# Altium PCB PCB1.PcbDoc (part 1 of 2)
Units mm, origin at the board's own origin, x right, y up, seen from the top; angles counter-clockwise.
Board outline 95 x 45 mm, 2 copper layers (Top Layer, Bottom Layer); 41 components, 96 nets, 303 pads, 0 vias.
Unrouted connection lines stored in the file: 18.
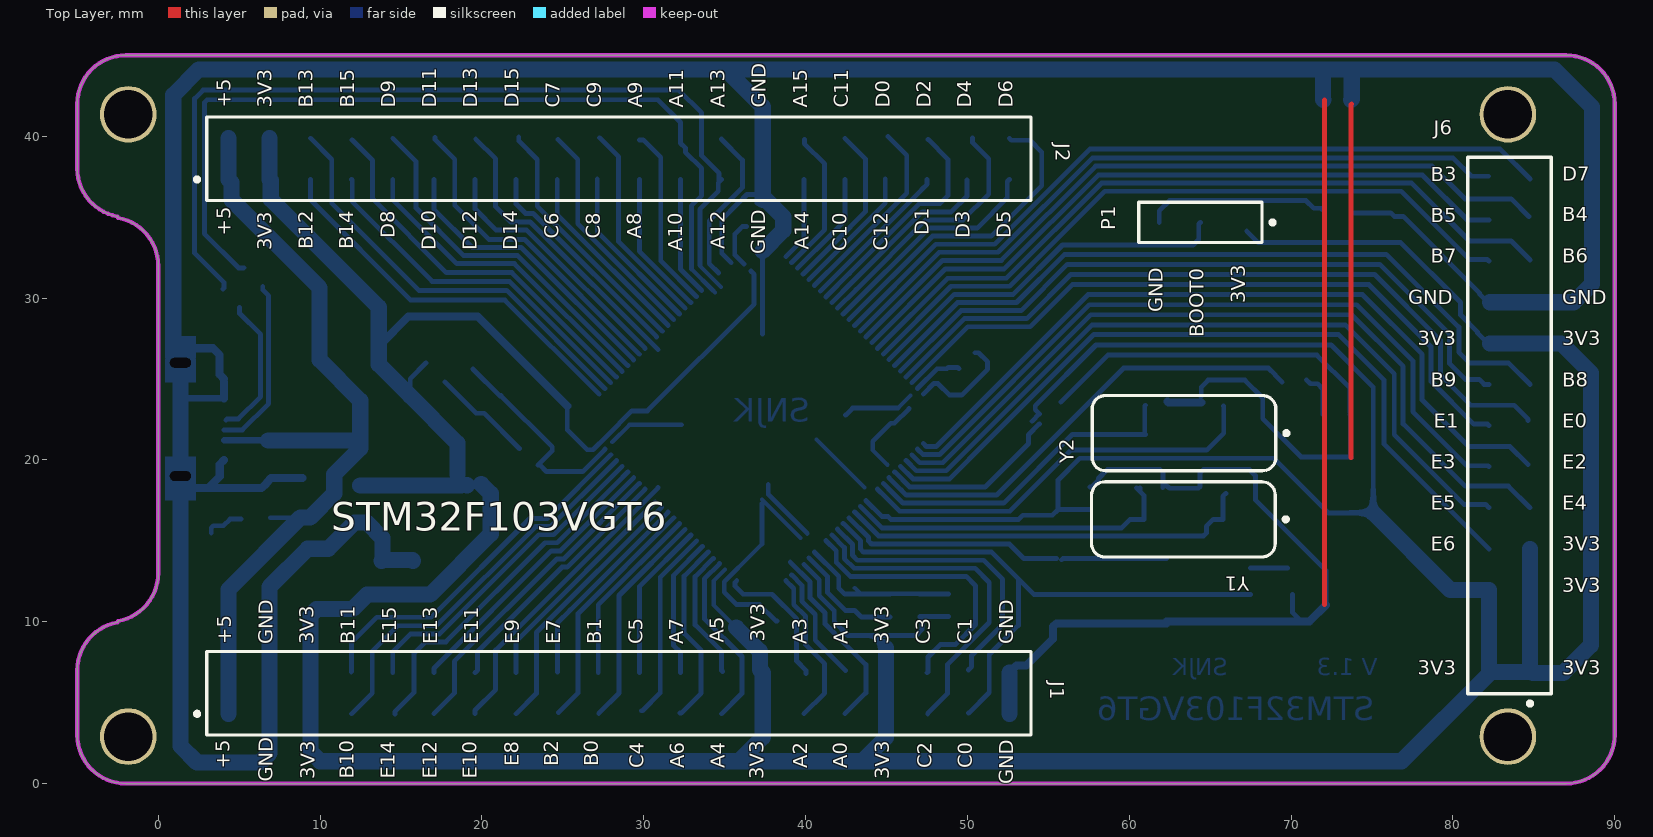
[diagram p0: Top Layer view]
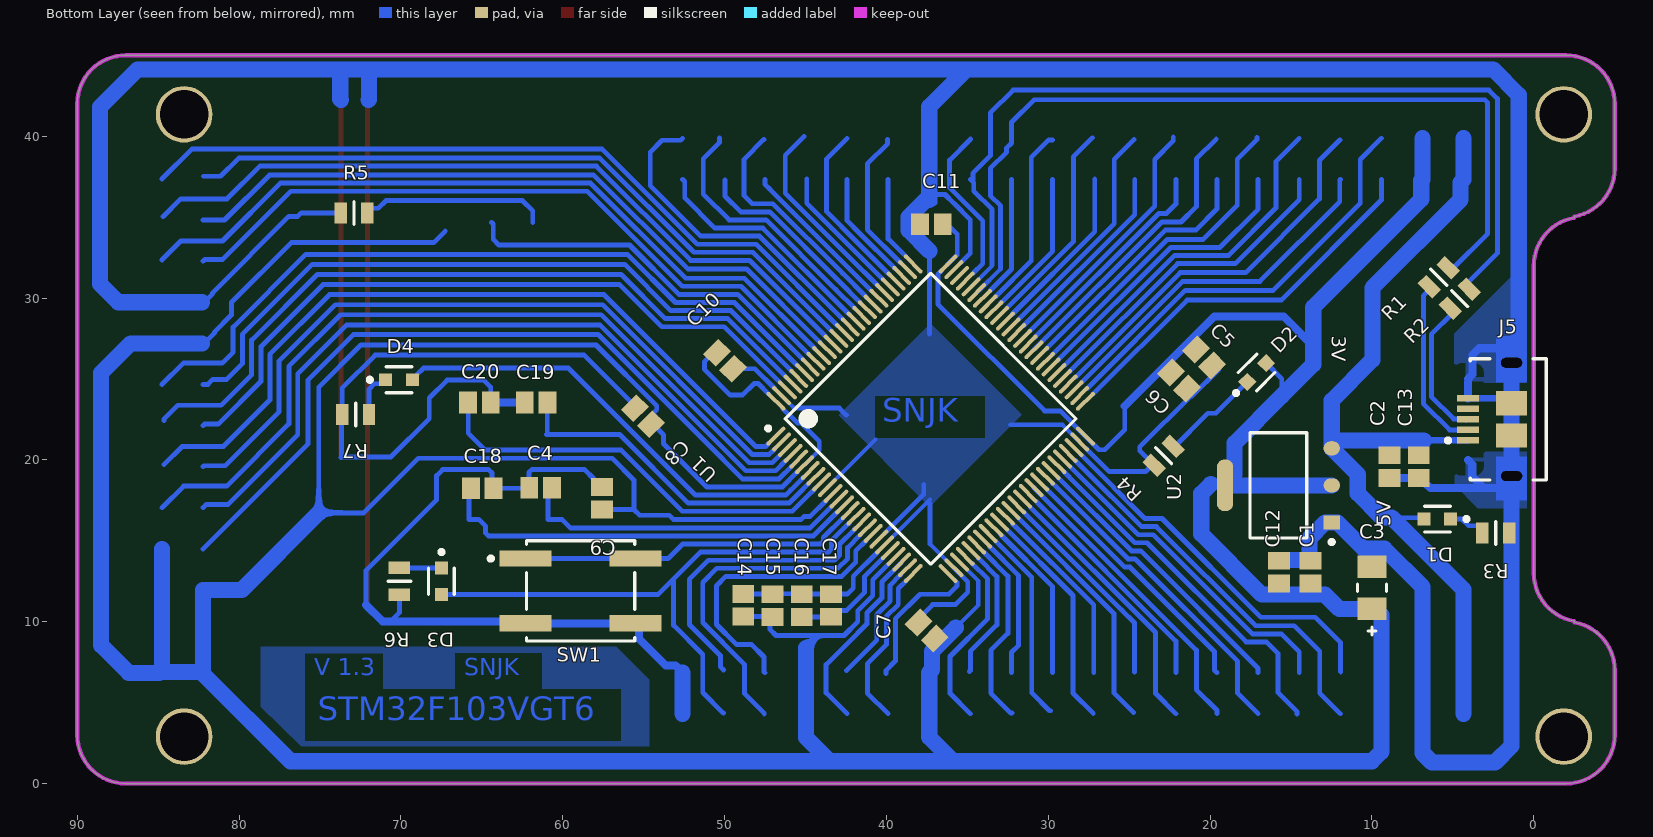
[diagram p1: Bottom Layer view, seen from below]

## Layer stack, top to bottom
Top Solder: solder mask 0.0102, Solder Resist, Dk 3.5
Top Layer: signal copper 0.0356
Dielectric 1: dielectric 0.32, FR-4, Dk 4.8
Bottom Layer: signal copper 0.0356
Bottom Solder: solder mask 0.0102, Solder Resist, Dk 3.5

## Board outline
-5,3 -5,7 cw(c-2,7) -2.521,9.954 -2.479,10.046 ccw(c-3,13) 0,13 0,32 ccw(c-3,32) -2.479,34.954 -2.521,35.046 cw(c-2,38) -5,38 -5,42 cw(c-2,42) -2,45 87,45 cw(c87,42) 90,42 90,3 cw(c87,3) 87,0 -2,0 cw(c-2,3)

## Design rules (kind name [scope] priority, off if disabled: settings)
Clearance [All] p1: gap=0.254 ignorepadtopadclearanceinfootprint=FALSE except(0.2: Arc-Arc Arc-Track Arc-SMDPad Track-Track Track-SMDPad SMDPad-SMDPad)
DiffPairsRouting [All] p1: maxlimit=0.5 minlimit=0.254 mostfreqgap=0.3 toplayer_minwidth=0.254 toplayer_maxwidth=0.5 toplayer_prefwidth=0.3 bottomlayer_minwidth=0.254 bottomlayer_maxwidth=0.5 bottomlayer_prefwidth=0.3 maxuncoupledlength=12.7
PolygonConnect PolygonConnect_5 [All vs IsNamedPolygon('GND_L02_P002')] p1: connectstyle=Direct reliefconductorwidth=0.254 reliefentries=4 polygonreliefangle="90 Angle" airgapwidth=0.254
PolygonConnect PolygonConnect_4 [All vs IsNamedPolygon('GND_L02_P002')] p2: thpad.connectstyle=Relief thpad.reliefconductorwidth=0.254 thpad.reliefentries=4 thpad.polygonreliefangle="90 Angle" thpad.airgapwidth=0.254 smdpad.connectstyle=Direct smdpad.reliefconductorwidth=0.254 smdpad.reliefentries=4 smdpad.polygonreliefangle="90 Angle" smdpad.airgapwidth=0.254 via.connectstyle=Relief via.reliefconductorwidth=0.254 via.reliefentries=4 via.polygonreliefangle="90 Angle" via.airgapwidth=0.254
PolygonConnect PolygonConnect_3 [All vs IsNamedPolygon('GND_L02_P002')] p3: thpad.connectstyle=Direct thpad.reliefconductorwidth=0.254 thpad.reliefentries=4 thpad.polygonreliefangle="90 Angle" thpad.airgapwidth=0.254 smdpad.connectstyle=Relief smdpad.reliefconductorwidth=0.254 smdpad.reliefentries=4 smdpad.polygonreliefangle="90 Angle" smdpad.airgapwidth=0.254 via.connectstyle=Relief via.reliefconductorwidth=0.254 via.reliefentries=4 via.polygonreliefangle="90 Angle" via.airgapwidth=0.254
PolygonConnect PolygonConnect_2 [All vs IsNamedPolygon('GND_L02_P002')] p4: thpad.connectstyle=Direct thpad.reliefconductorwidth=0.254 thpad.reliefentries=4 thpad.polygonreliefangle="90 Angle" thpad.airgapwidth=0.254 smdpad.connectstyle=Relief smdpad.reliefconductorwidth=0.254 smdpad.reliefentries=4 smdpad.polygonreliefangle="90 Angle" smdpad.airgapwidth=0.254 via.connectstyle=Relief via.reliefconductorwidth=0.254 via.reliefentries=4 via.polygonreliefangle="90 Angle" via.airgapwidth=0.254
PolygonConnect PolygonConnect_1 [All vs IsNamedPolygon('NONET_L02_P000')] p5: thpad.connectstyle=Direct thpad.reliefconductorwidth=0.254 thpad.reliefentries=4 thpad.polygonreliefangle="90 Angle" thpad.airgapwidth=0.254 smdpad.connectstyle=Relief smdpad.reliefconductorwidth=0.254 smdpad.reliefentries=4 smdpad.polygonreliefangle="90 Angle" smdpad.airgapwidth=0.254 via.connectstyle=Relief via.reliefconductorwidth=0.254 via.reliefentries=4 via.polygonreliefangle="90 Angle" via.airgapwidth=0.254
PolygonConnect [All] p6: connectstyle=Relief reliefconductorwidth=0.254 reliefentries=4 polygonreliefangle="90 Angle" airgapwidth=0.254
RoutingVias [All] p1: holewidth=0.711 width=1.27 viastyle="Through Hole" minholewidth=0.711 minwidth=1.27 maxholewidth=0.711 maxwidth=1.27
SolderMaskExpansion [All] p1: expansion=0.102 istentingtop=FALSE
SupplyNets "Schematic Supply Nets_2" [InNet('+5')] p1: voltage=0.000
SupplyNets "Schematic Supply Nets_1" [InNet('3V3')] p2: voltage=0.000
SupplyNets "Schematic Supply Nets" [InNet('GND')] p3: voltage=0.000
Width [All] p1: maxlimit=2 minlimit=0.254 preferedwidth=0.3
29 further rules are at their usual default settings.

## Classes and differential pairs
differential pair class DIFFPAIR_USB: USB_D
differential pair USB_D: +USB_D_P -USB_D_N

## Components (designator, comment, footprint, x,y, rotation, side; value= is the part's Value field where it differs from the comment)
C1 "C0805C105K3RACTU" CAPC2013X140X50LL20T25 13.803,13.069 r270 bottom
C2 "C0805C105K3RACTU" CAPC2013X140X50LL20T25 8.913,19.581 r90 bottom
C3 "TAJS226M004RNJ" FP-TAJS-MFG 10,12.1 r270 bottom
C4 "33pF" CAPC2013X140X50LL20T25 61.375,18.275 r180 bottom
C5 "10uF" CAPC2013X140X50LL20T25 20.375,26.325 r45 bottom
C6 "100nF" CAPC2013X140X50LL20T25 21.925,24.9 r45 bottom
C7 "100nF" CAPC2013X140X50LL20T25 37.515,9.451 r225 bottom
C8 "100nF" CAPC2013X140X50LL20T25 55.05,22.7 r225 bottom
C9 "100nF" CAPC2013X140X50LL20T25 57.575,17.625 r270 bottom
C10 "100nF" CAPC2013X140X50LL20T25 49.975,26.125 r45 bottom
C11 "100nF" CAPC2013X140X50LL20T25 37.226,34.562 r180 bottom
C12 "10nF" CAPC2013X140X50LL20T25 15.746,13.069 r270 bottom
C13 "10nF" CAPC2013X140X50LL20T25 7.106,19.581 r90 bottom
C14 "1uF" CAPC2013X140X50LL20T25 48.847,11.018 r270 bottom
C15 "10nF" CAPC2013X140X50LL20T25 47.04,10.997 r270 bottom
C16 "1uF" CAPC2013X140X50LL20T25 45.233,10.992 r270 bottom
C17 "10nF" CAPC2013X140X50LL20T25 43.426,11.002 r270 bottom
C18 "33puF" CAPC2013X140X50LL20T25 64.975,18.25 r0 bottom
C19 "33pF" CAPC2013X140X50LL20T25 61.65,23.55 r180 bottom
C20 "33puF" CAPC2013X140X50LL20T25 65.15,23.55 r0 bottom
D1 "SML-310VTT86" FP-SML-310VTT86-MFG 5.96,16.341 r0 bottom
D2 "SML-310VTT86" FP-SML-310VTT86-MFG 17.125,25.4 r135 bottom
D3 "SML-310VTT86" FP-SML-310VTT86-MFG 67.5,12.5 r270 bottom
D4 "SML-310VTT86" FP-SML-310VTT86-MFG 70.125,24.95 r180 bottom
J1 "7-534206-0" FP-7-534206-0-MFG#1 28.465,5.58 r0 top locked
J2 "7-534206-0" FP-7-534206-0-MFG#2 28.465,38.6 r0 top locked
J5 "105017-0001" USB-MICRO-B_V 2.725,22.5 r90 bottom locked
J6 "6-534206-3" FP-6-534206-3-MFG 83.495,22.12 r90 top locked
P1 "22-28-4033" MOLX-22-28-4033_V 64.4,34.675 r180 top
R1 "22ohm" FP-MCU0805-IPC_C 5.878,31.289 r315 bottom
R2 "22ohm" FP-MCU0805-IPC_C 4.578,29.967 r315 bottom
R3 "1kohm" FP-MCU0805-IPC_C 2.35,15.475 r180 bottom
R4 "1kohm" FP-MCU0805-IPC_C 22.875,20.25 r315 bottom
R5 "10k" FP-MCU0805-IPC_C 72.902,35.25 r180 bottom
R6 "1kohm" FP-MCU0805-IPC_C 70.1,12.5 r270 bottom
R7 "1kohm" FP-MCU0805-IPC_C 72.8,22.8 r0 bottom
SW1 "EVQ-Q2U02W" FP-EVQ-Q2U02W-MFG 58.9,11.9 r180 bottom
U1 "STM32F103VGT6" STM-LQFP100_L 37.267,22.542 r135 bottom locked
U2 "AMS1117-3.3" FP-AMS1117-IPC_C 15.78,18.425 r0 bottom locked
Y1 "FOXSLF/160-20" FOX-FOXSLF160-20#1 63.35,16.325 r180 top
Y2 "32.768 kHz" FOX-FOXSLF160-20#2 63.385,21.65 r180 top

## Footprints (in the part's own frame and the unit in brackets; to place one, negate y for a bottom-side part, rotate by r counter-clockwise, add the part's x,y. Pads: shape width x height; smd on the part's side, far side on the other; paste and mask are expansions set on the pad)
CAPC2013X140X50LL20T25 [mm] "Chip Capacitor, 2-Leads, Body 2.00x1.25mm, IPC High Density"
  rect 1.1x1.35 smd: 1(-0.7,0) 2(0.7,0)
  body extent -1.1,-0.73 1.1,0.73, height 1.4
FOX-FOXSLF160-20#1 [mm] "THD, 2-Leads, Body 11.35x4.65mm"
  rrect50% 2.825x1.2 on Mech7: 1(-2.44,0)
  rrect50% 2.75x1.2 on Mech7: 2(2.44,0)
  silkscreen extent -6.45,-2.33 5.68,2.32, body extent -5.67,-2.32 5.68,2.33, height 3.6
FOX-FOXSLF160-20#2 [mm] "THD, 2-Leads, Body 11.35x4.65mm"
  rrect50% 2.825x1.2 on Mech7: 1(-2.44,0)
  oval 2.825x1.2 on Mech7: 2(2.44,0)
  silkscreen extent -6.45,-2.33 5.68,2.32, body extent -5.67,-2.32 5.68,2.33, height 3.6
FP-6-534206-3-MFG [mm]
  round 0.025 on Mech7 paste-2539.97 mask+0: 1(-15.24,-1.27) 3(-12.7,-1.27) 5(-10.16,-1.27) 7(-7.62,-1.27) 9(-5.08,-1.27) 11(-2.54,-1.27) 13(0,-1.27) 15(2.54,-1.27) 17(5.08,-1.27) 19(7.62,-1.27) 21(10.16,-1.27) 23(12.7,-1.27) 25(15.24,-1.27)
  rrect50% 1.39x1.795 on Mech7 paste-2539.97 mask+0: 2(-15.24,1.27)
  rrect50% 1.39x1.72 on Mech7 paste-2539.97 mask+0: 4(-12.7,1.27) 6(-10.16,1.27) 18(5.08,1.27) 20(7.62,1.27)
  rrect50% 1.39x1.745 on Mech7 paste-2539.97 mask+0: 8(-7.62,1.27) 10(-5.08,1.27) 12(-2.54,1.27) 16(2.54,1.27)
  rrect50% 1.39x1.77 on Mech7 paste-2539.97 mask+0: 14(0,1.27) 24(12.7,1.27)
  rrect50% 1.39x1.82 on Mech7 paste-2539.97 mask+0: 22(10.16,1.27) 26(15.24,1.27)
  silkscreen extent -17.3,-2.58 16.58,2.58, body extent -16.68,-2.68 16.68,2.68, height 0.25
FP-7-534206-0-MFG#1 [mm]
  round 0.025 on Mech7 paste-2539.97 mask+0: 1(-24.13,-1.27) 3(-21.59,-1.27) 5(-19.05,-1.27) 7(-16.51,-1.27) 9(-13.97,-1.27) 11(-11.43,-1.27) 13(-8.89,-1.27) 15(-6.35,-1.27) 17(-3.81,-1.27) 19(-1.27,-1.27) 21(1.27,-1.27) 23(3.81,-1.27) 25(6.35,-1.27) 27(8.89,-1.27) 29(11.43,-1.27) 31(13.97,-1.27) 33(16.51,-1.27) 35(19.05,-1.27) 37(21.59,-1.27) 39(24.13,-1.27)
  rrect50% 1.39x1.77 on Mech7 paste-2539.97 mask+0: 2(-24.13,1.27) 4(-21.59,1.27) 10(-13.97,1.27) 12(-11.43,1.27) 16(-6.35,1.27) 22(1.27,1.27) 28(8.89,1.27)
  rrect50% 1.39x1.745 on Mech7 paste-2539.97 mask+0: 6(-19.05,1.27) 8(-16.51,1.27) 18(-3.81,1.27) 36(19.05,1.27)
  rrect50% 1.39x1.595 on Mech7 paste-2539.97 mask+0: 14(-8.89,1.27)
  rrect50% 1.39x1.72 on Mech7 paste-2539.97 mask+0: 20(-1.27,1.27) 24(3.81,1.27) 34(16.51,1.27)
  rrect50% 1.39x1.57 on Mech7 paste-2539.97 mask+0: 26(6.35,1.27)
  rrect50% 1.39x1.39 on Mech7 paste-2539.97 mask+0: 30(11.43,1.27) 32(13.97,1.27)
  rrect80% 1.39x1.62 on Mech7 paste-2539.97 mask+0: 38(21.59,1.27)
  rrect50% 1.39x1.85 on Mech7 paste-2539.97 mask+0: 40(24.13,1.27)
  silkscreen extent -26.19,-2.58 25.47,2.58, body extent -25.57,-2.68 25.57,2.68, height 0.25
FP-7-534206-0-MFG#2 [mm]
  rrect50% 1.39x1.75 on Mech7 paste-2539.97 mask+0: 1(-24.13,-1.27) 5(-19.05,-1.27) 9(-13.97,-1.27)
  round 0.025 on Mech7 paste-2539.97 mask+0: 2(-24.13,1.27) 4(-21.59,1.27) 6(-19.05,1.27) 8(-16.51,1.27) 10(-13.97,1.27) 12(-11.43,1.27) 14(-8.89,1.27) 16(-6.35,1.27) 18(-3.81,1.27) 20(-1.27,1.27) 22(1.27,1.27) 24(3.81,1.27) 26(6.35,1.27) 28(8.89,1.27) 30(11.43,1.27) 32(13.97,1.27) 34(16.51,1.27) 36(19.05,1.27) 38(21.59,1.27) 40(24.13,1.27)
  rrect50% 1.39x1.825 on Mech7 paste-2539.97 mask+0: 3(-21.59,-1.27)
  rrect50% 1.39x1.875 on Mech7 paste-2539.97 mask+0: 7(-16.51,-1.27) 17(-3.81,-1.27)
  rrect50% 1.39x1.8 on Mech7 paste-2539.97 mask+0: 11(-11.43,-1.27)
  rrect50% 1.39x1.85 on Mech7 paste-2539.97 mask+0: 13(-8.89,-1.27)
  rrect50% 1.39x1.765 on Mech7 paste-2539.97 mask+0: 15(-6.35,-1.27)
  rrect50% 1.39x1.74 on Mech7 paste-2539.97 mask+0: 19(-1.27,-1.27)
  rrect50% 1.39x1.775 on Mech7 paste-2539.97 mask+0: 21(1.27,-1.27)
  rrect50% 1.39x1.39 on Mech7 paste-2539.97 mask+0: 23(3.81,-1.27) 25(6.35,-1.27)
  rrect50% 1.39x1.725 on Mech7 paste-2539.97 mask+0: 27(8.89,-1.27)
  rrect50% 1.39x1.665 on Mech7 paste-2539.97 mask+0: 29(11.43,-1.27)
  rrect50% 1.39x1.865 on Mech7 paste-2539.97 mask+0: 31(13.97,-1.27)
  rrect50% 1.39x1.59 on Mech7 paste-2539.97 mask+0: 33(16.51,-1.27)
  rrect80% 1.39x1.775 on Mech7 paste-2539.97 mask+0: 35(19.05,-1.27)
  rrect80% 1.39x1.8 on Mech7 paste-2539.97 mask+0: 37(21.59,-1.27)
  rrect80% 1.39x1.725 on Mech7 paste-2539.97 mask+0: 39(24.13,-1.27)
  silkscreen extent -26.19,-2.58 25.47,2.58, body extent -25.57,-2.68 25.57,2.68, height 0.25
FP-AMS1117-IPC_C [mm]
  rect 1.004x0.872 smd paste+0 mask+0: 1(-3.295,2.29)
  rrect100% 1.004x0.872 smd paste+0 mask+0: 2(-3.295,0) 3(-3.295,-2.29)
  rrect87% 1.004x3.182 smd paste+0 mask+0: 4(3.295,0)
  silkscreen extent -3.42,-3.25 1.75,3.62, body extent -3.53,-3.25 3.53,3.25, height 1.8
FP-EVQ-Q2U02W-MFG [mm]
  rect 3.2x1 smd paste+0 mask+0: A(-3.4,2) A'(3.4,2) B(-3.4,-2) B'(3.4,-2)
  silkscreen extent -5.68,-3.1 3.35,3.1, body extent -3.3,-3 3.3,3, height 2.7
FP-MCU0805-IPC_C [mm]
  rect 0.759x1.308 smd paste+0 mask+0: 1(-0.827,0) 2(0.827,0)
  silkscreen extent 0,-0.7 0,0.7, body extent -1,-0.63 1,0.63, height 0.55
FP-SML-310VTT86-MFG [mm]
  rect 0.8x0.8 smd paste+0 mask+0: 1(-0.825,0) 2(0.825,0)
  silkscreen extent -1.92,-0.8 0.8,0.8, body extent -0.8,-0.4 0.8,0.4, height 0.9
FP-TAJS-MFG [mm]
  rect 1.4x1.8 smd paste+0 mask+0: 1(-1.3,0) 2(1.3,0)
  silkscreen extent -0.23,-0.9 2.92,0.9, body extent -1.6,-0.8 1.6,0.8, height 1.2
MOLX-22-28-4033_V [mil] "THD, 3-Leads, Body 7.62x2.49mm, Pitch 2.54mm"
  round 1 on Mech7: 1(-100,0) 3(100,0)
  rrect50% 75.79x61.02 on Mech7: 2(0,0)
  silkscreen extent -181,-49 150,49, body extent -150,-49 150,49, height 330
STM-LQFP100_L [mm] "Thin QFP, 100-Leads, Body 14x14mm, Pitch 0.5mm, IPC High Density"
  oval 1.55x0.25 smd: 1(-7.525,6) 2(-7.525,5.5) 3(-7.525,5) 4(-7.525,4.5) 5(-7.525,4) 6(-7.525,3.5) 7(-7.525,3) 8(-7.525,2.5) 9(-7.525,2) 10(-7.525,1.5) 11(-7.525,1) 12(-7.525,0.5) 13(-7.525,0) 14(-7.525,-0.5) 15(-7.525,-1) 16(-7.525,-1.5) 17(-7.525,-2) 18(-7.525,-2.5) 19(-7.525,-3) 20(-7.525,-3.5) 21(-7.525,-4) 22(-7.525,-4.5) 23(-7.525,-5) 24(-7.525,-5.5) 25(-7.525,-6) 51(7.525,-6) 52(7.525,-5.5) 53(7.525,-5) 54(7.525,-4.5) 55(7.525,-4) 56(7.525,-3.5) 57(7.525,-3) 58(7.525,-2.5) 59(7.525,-2) 60(7.525,-1.5) 61(7.525,-1) 62(7.525,-0.5) 63(7.525,0) 64(7.525,0.5) 65(7.525,1) 66(7.525,1.5) 67(7.525,2) 68(7.525,2.5) 69(7.525,3) 70(7.525,3.5) 71(7.525,4) 72(7.525,4.5) 73(7.525,5) 74(7.525,5.5) 75(7.525,6)
  oval 0.25x1.55 smd: 26(-6,-7.525) 27(-5.5,-7.525) 28(-5,-7.525) 29(-4.5,-7.525) 30(-4,-7.525) 31(-3.5,-7.525) 32(-3,-7.525) 33(-2.5,-7.525) 34(-2,-7.525) 35(-1.5,-7.525) 36(-1,-7.525) 37(-0.5,-7.525) 38(0,-7.525) 39(0.5,-7.525) 40(1,-7.525) 41(1.5,-7.525) 42(2,-7.525) 43(2.5,-7.525) 44(3,-7.525) 45(3.5,-7.525) 46(4,-7.525) 47(4.5,-7.525) 48(5,-7.525) 49(5.5,-7.525) 50(6,-7.525) 76(6,7.525) 77(5.5,7.525) 78(5,7.525) 79(4.5,7.525) 80(4,7.525) 81(3.5,7.525) 82(3,7.525) 83(2.5,7.525) 84(2,7.525) 85(1.5,7.525) 86(1,7.525) 87(0.5,7.525) 88(0,7.525) 89(-0.5,7.525) 90(-1,7.525) 91(-1.5,7.525) 92(-2,7.525) 93(-2.5,7.525) 94(-3,7.525) 95(-3.5,7.525) 96(-4,7.525) 97(-4.5,7.525) 98(-5,7.525) 99(-5.5,7.525) 100(-6,7.525)
  silkscreen extent -7.65,-6.35 6.35,6.8, body extent -7,-7 7,7, height 1.6
USB-MICRO-B_V [mm] "USB, MICRO B, Body 7.491x4.695 mm, Pitch 0.65 mm"
  rect 0.4x1.35 smd: 1(-1.3,1.35) 2(-0.65,1.35) 3(0,1.35) 4(0.65,1.35) 5(1.3,1.35)
  rrect50% 1.45x1.45 on Bottom Paste: 6(-2.5,1.35) 7(2.5,1.35)
  rrect50% 0x0 hole 0.6 slot 1.3 at 90 deg: 8(-3.5,-1.35) 11(3.5,-1.35)
  rect 1.5x1.9 smd: 9(-1,-1.35) 10(1,-1.35)
  Top Layer region: -3.6,-1.8 -3.6,-0.9 -4.1,-0.9 -4.1,-1.8
  Top Layer region: 3.6,-0.9 3.6,-1.8 4.1,-1.8 4.1,-0.9
  Top Layer region: 2.3,-0.4 2.3,-2.3 3.6,-2.3 3.6,-0.4
  Top Layer region: -2.3,-2.3 -2.3,-0.4 -3.6,-0.4 -3.6,-2.3
  Top Layer lines w0.5: 3.8,-1.65 ccw(c3.6,-1.8) 3.75,-1.6 ccw(c3.6,-1.8) 3.6,-1.55 ccw(c3.6,-1.8) 3.8,-1.65 ; -3.779,-1.625 cw(c-3.6,-1.8) -3.75,-1.6 cw(c-3.6,-1.8) -3.6,-1.55 cw(c-3.6,-1.8) -3.779,-1.625 ; 3.575,-1.149 ccw(c3.6,-0.9) 3.6,-0.65 ccw(c3.6,-0.9) 3.575,-0.651 ccw(c3.6,-0.9) 3.575,-1.149 ; -3.5,-1.129 ccw(c-3.6,-0.9) -3.5,-0.671 ccw(c-3.6,-0.9) -3.6,-0.65 ccw(c-3.6,-0.9) -3.8,-1.05 ccw(c-3.6,-0.9) -3.75,-1.1 ccw(c-3.6,-0.9) -3.5,-1.129
  silkscreen extent -3.75,-3.5 3.75,2.7, body extent -4.1,-3.9 4.1,1.5, height 2.67

## Part data
C1 C2: library part CMP-2007-03234-1, "10uf", Manufacturer=Kemet, Part Number=C0805C105K3RACTU
C3: library part CMP-04424-000180-1, "22uF 4V  ±20% 3.5Ω 1206  SMD Tantalum Capacitor", Capacitance=22uF, Case Code (Imperial)=1206, Case Code (Metric)=3216, Dielectric Material=Tantalum, ESR (Equivalent Series Resistance)=3.5R, Leakage Current=900nA, Max Operating Temperature=125°C, Min Operating Temperature=-55°C, Package Quantity=2500, Tolerance=20%, Voltage Rating=4V, Case/Package=1206, Construction=Flat, Depth=1.6mm, Dissipation Factor=8%, Features="General Purpose", Height=1.2mm, Height - Seated (Max)=0.047inch, Lead Free="Lead Free", Length=3.2mm, Mount="Surface Mount", Number of Pins=2, Packaging="Tape and Reel", Polarity=Polar, Radiation Hardening=No, RoHS Compliant=Yes, Series=TAJ, Termination=SMD/SMT, Voltage Rating (DC)=4V, Weight=0.000571oz, Width=0.063inch
C4 C18 C19 C20: library part CMP-2007-03234-1, "33pF 0805", Manufacturer=Kemet, Part Number=C0805C105K3RACTU
C5: library part CMP-2007-03234-1, "10uF 0805", Manufacturer=Kemet, Part Number=C0805C105K3RACTU
C6 C7 C8 C9 C10 C11: library part CMP-2007-03234-1, "100nF 0805", Manufacturer=Kemet, Part Number=C0805C105K3RACTU
C12 C13 C15 C17: library part CMP-2007-03234-1, "10nF 0805", Manufacturer=Kemet, Part Number=C0805C105K3RACTU
C14 C16: library part CMP-2007-03234-1, "1uF 0805", Manufacturer=Kemet, Part Number=C0805C105K3RACTU
D1 D2 D3 D4: library part CMP-2000-07115-2, "LED RED CLEAR 0603 SMD", Colour=Red, Forward Current=20mA, Forward Voltage=2V, Manufacturer=Rohm, Package=0, Power Dissipation=55mW, Reverse Voltage=4V, Temperature="-30°C to +85°C", Temperature Range High=+85°C, Temperature Range Low=-30°C, Automotive=No, Category=Diode, ComponentLink2Description=Datasheet, ComponentLink2URL=https://www.mouser.com/datasheet/2/348/sml-31-312817.pdf, Device Class L1=Optoelectronics, Device Class L2=LEDs, Device Class L3=unset, Digikey Description="LED RED CLEAR 0603 SMD", Height=0.9mm, Lead Free=Yes, Led Orientation="Top View", Luminous Intensity=4mcd, Manufacturer Part Number=SML-310VTT86, Mouser Description="Standard LEDs - SMD RED 650NM SMD TRANSPARENT LENS", Obsolete Part=true, Octopart=https://octopart.com/sml-310vtt86-rohm-550741, RoHS=TRUE, Wavelength=630nm
J1 J2: library part CMP-03369-000068-1, "CONN RCPT 40POS 0.1 GOLD PCB", Current Rating=2A, Manufacturer="TE Connectivity", Temperature="-65°C to +105°C", Temperature Range High=+105°C, Temperature Range Low=-65°C, Voltage Rating=333V, Automotive=No, Category=Conn, ComponentLink2Description=Datasheet, ComponentLink2URL=https://octopart.com/datasheet/7-534206-0-te+connectivity-39516831, Conn Gender=Female, Conn Orientation=Vertical, Contact Material=Gold,Nickel, Device Class L1=Connectors, Device Class L2="Headers and Wire Housings", Device Class L3=unset, Digikey Description="CONN RCPT 40POS 0.1 GOLD PCB", Footprint Url=https://www.mouser.in/datasheet/2/418/NG_CD_534206_R7-1252933.pdf, Height=8.9mm, Is Female=yes, Lead Free=Yes, Manufacturer Part Number=7-534206-0, Mouser Description="Headers & Wire Housings REC 2X20P VRT T/H", Number Of Contacts=40, Number Of Rows=2, Octopart=https://octopart.com/7-534206-0-te+connectivity-39516831, Package=7-534206-0, Pitch=2.54mm, RoHS=TRUE, Standoff Height=0.38mm
J5: library part CMP-2000-05827-1, "Micro-USB B Receptacle, Right Angle, Bottom Mount, Surface Mount, with Solder Tabs, -30 to 85 degC, 5-Pin USB, RoHS, Tape and Reel", Manufacturer=Molex, Package Description="5-Leads USB, Micro B, Body 7.5 x 5 mm, Pitch 0.65 mm", Package Reference=MICRO-B, Package Version="Rev. F, 12/2012", Standard Package=1, Voltage - Max=30V, 3D Model=105017-0001.stp, Catalog Drawings=1050170001, Category=Connectors,Interconnects, Circuits=5, Connector Type=USB-microB, Datasheet URL=http://www.molex.com/elqNow/elqRedir.htm?ref=http://www.molex.com/webdocs/datasheets/pdf/en-us/1050170001_IO_CONNECTORS.pdf, Datasheet Version=03/2016, Family=USB,DVI,HDMIConnectors, Featured Product=Micro-USBConnectorsUSBConnectors, Features=Shielded,SolderRetention, Gender=Receptacle, Ingress Protection=-, Manufacturer URL=http://www.molex.com/, Mating Products=WM17145-ND-CABLEMICROUSBBTOSTDA1.0MWM17147-ND-CABLEMICROUSBBTOSTDA2.0MWM17146-ND-CABLEMICROUSBBTOSTDA1.5M, Mounting Technology=SurfaceMount, Mounting Type=BoardCutout,SurfaceMount,RightAngle, Number Of Contacts=5, Online Catalog=Molex-MicroUSB, Other Names=WM1399DKR, Package URL=http://www.molex.com/pdm_docs/sd/1050170001_sd.pdf, Packaging=Digi-Reel®, PCN Assembly/Origin=ResinSupplier21/Oct/2015, RoHS Information=1050170001CertofCompliance, Series=-, Specifications=-
J6: library part CMP-03369-000010-1, "CONN RCPT 26POS 0.1 GOLD PCB", Current Rating=2A, Manufacturer="TE Connectivity", Temperature="-65°C to +105°C", Temperature Range High=+105°C, Temperature Range Low=-65°C, Voltage Rating=333V, Automotive=No, Category=Conn, ComponentLink2Description=Datasheet, ComponentLink2URL=https://www.te.com/commerce/DocumentDelivery/DDEController?Action=showdoc&DocId=Specification+Or+Standard%7F114-25018%7FE%7Fpdf%7FEnglish%7FENG_SS_114-25018_E.pdf%7F6-534206-7, Conn Gender=Female, Conn Orientation=Vertical, Contact Material=Gold,Nickel, Device Class L1=Connectors, Device Class L2="Headers and Wire Housings", Device Class L3=unset, Digikey Description="CONN RCPT 26POS 0.1 GOLD PCB", Footprint Url=https://www.te.com/commerce/DocumentDelivery/DDEController?Action=showdoc&DocId=Customer+Drawing%7F534206%7FR7%7Fpdf%7FEnglish%7FENG_CD_534206_R7.pdf%7F6-534206-3, Height=8.9mm, Is Female=yes, Lead Free=Yes, Manufacturer Part Number=6-534206-3, Mouser Description="Headers & Wire Housings REC 2X13P VRT T/H", Number Of Contacts=26, Number Of Rows=2, Octopart=https://octopart.com/6-534206-3-te+connectivity-39516811, Package=6-534206-3, Pitch=2.54mm, RoHS=TRUE, Standoff Height=0.38mm
P1: library part CMP-1676-00001-5, "Male Header, Pitch 2.54 mm, 1 x 3 Position, Height 8.38 mm, Tail Length 3.18 mm, RoHS, Bulk", Colour=Black, Current Rating="4 A", Manufacturer=Molex, Max Operating Temperature="75 degC", Min Operating Temperature="0 degC", Package Quantity=1, Voltage Rating="250 V", ComponentLink1Description="Manufacturer URL", ComponentLink1URL=http://www.molex.com/, ComponentLink2Description=Datasheet, ComponentLink2URL=http://www.molex.com/pdm_docs/sd/022284033_sd.pdf, Contact Finish=Gold, Contact Material=Brass, Contact Plating=Gold, DatasheetVersion="Rev. G, 01/2012", Height="8.38 mm", Lead Pitch="0.1 inch", Length="7.62 mm", Mount="Through Hole", Mounting Technology="Through Hole", PackageDescription="Male Header, Pitch 2.54 mm, 1 x 3 Position, Height 8.38 mm, Tail Length 3.18 mm", PackageReference=22-28-4033, Packaging=Bulk, Pins=3, REACH SVHC=Unknown, RoHSCompliant=true, Rows=1
R1 R2 R3 R4 R6 R7: library part CMP-02407-010458-1, "RES 1.05K OHM 0.5% 1/5W 0805", Case/Package=0805, Max Operating Temperature=125°C, Max Power Dissipation=125mW, Min Operating Temperature=-55°C, Package Quantity=1000, Resistance=10kR, Temperature Coefficient=25ppm/°C, Tolerance=0.1%, Voltage Rating (DC)=100V, Composition="Thin Film", Contact Plating=Tin, Depth=1.25mm, Height=0.022inch, Lead Free="Lead Free", Length=2mm, Military Standard=Not, Mount="Surface Mount", Number of Terminations=2, Packaging="Tape and Reel", Power Rating=125mW, Radiation Hardening=No, Width=0.049inch
R5: library part CMP-02407-010458-1, "RES 10K OHM 0.5% 1/5W 0805", Case/Package=0805, Max Operating Temperature=125°C, Max Power Dissipation=125mW, Min Operating Temperature=-55°C, Package Quantity=1000, Resistance=10kR, Temperature Coefficient=25ppm/°C, Tolerance=0.1%, Voltage Rating (DC)=100V, Composition="Thin Film", Contact Plating=Tin, Depth=1.25mm, Height=0.022inch, Lead Free="Lead Free", Length=2mm, Military Standard=Not, Mount="Surface Mount", Number of Terminations=2, Packaging="Tape and Reel", Power Rating=125mW, Radiation Hardening=No, Width=0.049inch
SW1: library part CMP-00287-39797402-1, "EVQ-Q2U02W Switch Tactile ON OFF SPST Round Button J-Bend 0.02A 15VDC 2.6N SMD Embossed T/R", Case/Package=SMD/SMT, Color=White, Contact Current Rating=20mA, Contact Resistance=100mΩ, Max Operating Temperature=85°C, Max Voltage Rating (AC)=250V, Max Voltage Rating (DC)=15V, Min Operating Temperature=-40°C, Operating Force=2.6N, Actuator Length=700µm, Contact Plating="Gold, Silver", Current Rating=20mA, Depth=6.6mm, Electrical Life=200kcycles, Height=2.7mm, Illumination Type="Illuminated, Non-Illuminated", Lead Free="Lead Free", Length=6mm, Life (Cycles)=200kcycles, Max Current Rating=20mA, Mechanical Life=200kcycles, Mount="Surface Mount", NexarPartId=39797402, Number of Positions=2, Orientation=Straight, Radiation Hardening=No, REACH SVHC=Unknown, RoHS=Compliant, Switch Function=Off-Mom, Switch Travel=250µm, Termination=SMD/SMT, Thickness=1.8mm, Throw Configuration=SPST, Voltage Rating (AC)=250V, Voltage Rating (DC)=15V, Width=6mm
U1: library part CMP-0237-00108-3, "ARM Cortex-M3 32-bit MCU, 1024 KB Flash, 96 KB Internal RAM, 80 I/Os, 100-pin LQFP, -40 to 85 degC, Tray", I/Os (High Current)=80, Operating Frequency(F) (Processor speed) (MHz)=72, Supply Voltage(Vcc) min (V)=2, A/D Converter="3x12-bit (16 Channel)", ComponentLink1Description="Manufacturer URL", ComponentLink1URL=http://www.st.com/web/en/home.html, ComponentLink2Description=Datasheet, ComponentLink2URL=http://www.st.com/st-web-ui/static/active/en/resource/technical/document/datasheet/CD00253742.pdf, ComponentLink3Description="Package Specification", ComponentLink3URL=http://www.st.com/st-web-ui/static/active/en/resource/technical/document/data_brief/DM00071938.pdf, Core="ARM Cortex-M3", D/A Converter="2x12-bit (2 Channel)", DatasheetVersion="Rev. 3", FLASH Size (Prog) (kB)=1024, Internal RAM Size (kB)=96, Mounting Technology="Surface Mount", PackageDescription="100-Pin Low Profile Quad Flat Package, 14 x 14 mm Body, 0.5 mm Pitch", PackageReference=LQFP100, PackageVersion="Rev. 1, 06/2013", Packing=Tray, PartNumber=STM32F103VGT6
U2: library part CMP-209535-000001-1, "LDO Voltage Regulators 1A, 3.3V", Dropout Voltage=1.1V, Manufacturer="Advanced Monolithic Systems", Max Junction Temp=+125°C, Max Power Dissipation=1.2W, Max Supply Voltage=15V, Nominal Supply Current=5mA, Output Current=1A, Output Voltage=3.3V, Package=AMS1117, Temperature="-40°C to +125°C", Temperature Range Low=-40°C, Automotive=No, Category=IC, ComponentLink2Description=Datasheet, ComponentLink2URL=http://www.advanced-monolithic.com/pdf/ds1117.pdf, Device Class L1="Integrated Circuits (ICs)", Device Class L2="Power Management ICs", Device Class L3="Voltage Regulators - Linear", Height=1.8mm, Ipc Land Pattern Name=SOT229P700X180-4, Lead Free=Yes, Manufacturer Part Number=AMS1117-3.3, Number Of Outputs=1, Octopart=https://octopart.com/ams1117-3.3-advanced+monolithic+systems-25899300, Output Type=Fixed, RoHS=TRUE, Standoff Height=0.64mm, Temperature Range High=+125°C
Y1: library part CMP-1749-00003-1, "Resistance Weld Thru-Hole Crystal, 16 MHz, -20 to 70 degC, 2-Pin THD, RoHS, Bulk", Case\Package=Axial, Max Operating Temperature="155 degC", Min Operating Temperature="-55 degC", Package Quantity=200, Power Rating="250 mW", Resistance="221 kohm", Tolerance=1%, Voltage Rating="250 V", ComponentLink1Description="Manufacturer URL", ComponentLink1URL=http://www.foxonline.com/, ComponentLink2Description=Datasheet, ComponentLink2URL=http://www.foxonline.com/pdfs/hc49slf.pdf, DatasheetVersion=Mar-15, Length="0.248 inch", Mount="Through Hole", PackageDescription="2-Pin Through Hole Device, Body 11.35 x 4.65 mm", PackageReference=FOXSLF160-20, Packaging=Bulk, RoHSCompliant=true
Y2: library part CMP-1749-00003-1, "Resistance Weld Thru-Hole Crystal, 32.768 kHz, -20 to 70 degC, 2-Pin THD, RoHS, Bulk", Case\Package=Axial, Max Operating Temperature="155 degC", Min Operating Temperature="-55 degC", Package Quantity=200, Power Rating="250 mW", Resistance="221 kohm", Tolerance=1%, Voltage Rating="250 V", ComponentLink1Description="Manufacturer URL", ComponentLink1URL=http://www.foxonline.com/, ComponentLink2Description=Datasheet, ComponentLink2URL=http://www.foxonline.com/pdfs/hc49slf.pdf, DatasheetVersion=Mar-15, Length="0.248 inch", Mount="Through Hole", PackageDescription="2-Pin Through Hole Device, Body 11.35 x 4.65 mm", PackageReference=FOXSLF160-20, Packaging=Bulk, RoHSCompliant=true

## Free pads (board coordinates)
  round 1.524 on Mech7: 2(76.152,35.275)
  rrect50% 1.524x1.524 on Mech7 mask+0.102: 3(73.7,20.15)
  round 0.025 on Mech7 paste-2539.97 mask+0.102: 4(72.15,11.025)
  round 3.5 hole 3: 5(-1.85,2.9) 5(-1.85,41.35) 5(83.4,2.9) 5(83.4,41.35)
  round 0.025 on Mech7: 6(72.075,42.25) 7(73.7,42.25)

## Nets (pads, with @x,y where several pads share a name; then routed paths per layer and width w, separated by ;. In a path a pad name is that pad's centre, name@x,y a point inside that pad or via, vN(x,y) a via of type N, cw(c..) or ccw(c..) an arc to the next point about the centre after c; other vN are vias at no path point)
3V3: C1.2 C3.2 C5.2 C6.2 C7.2 C8.2 C9.2 C10.2 C11.2 C12.2 C14.2 C15.2 D2.2 J1.5 J1.6 J1.27 J1.28 J1.33 J1.34 J2.3 J2.4 J6.1 J6.2 J6.3 J6.4 J6.5 J6.6 J6.7 J6.17 J6.18 P1.1 U1.6 U1.11 U1.22 U1.28 U1.50 U1.75 U1.100 U2.2 U2.4 | length 371.2
  Bottom Layer w0.254: U1.28@35.025,13.226 34.325,12.526 34.325,11.025 35.715,9.635 ; 44.15,20.609 U1.6 ; C15.2 47.25,10.087 C15.2@47.19,10.027
  Bottom Layer w0.3: 15.575,23.95 15.575,25.017 D2.2 ; 25.275,23.318 25.275,21.85 26.5,20.625 26.865,20.625 U1.50 29.265,23.025 30.225,23.025 36.825,29.625 36.825,31.467 U1.75@36.63,31.663 ; C11.2@35.992,34.314 35.625,33.948 35.625,32.67 U1.75 ; C11.2@36.115,34.418 C11.2@36.366,34.418 ; U1.22@39.898,13.548 40.85,12.596 40.85,11.607 41.775,10.682 41.775,10 42.625,9.15 44.2,9.15 ; U1.11@43.737,17.486 44.714,16.51 45.09,16.51 45.275,16.325 53.175,16.325 53.425,16.575 55.25,16.575 55.6,16.925 ; 44.15,20.609 44.15,21.149 45.268,22.267 45.492,22.267 U1.100@46.396,23.171 ; 44.975,8.375 44.2,9.15 ; U1.6@45.505,19.254 46.434,18.325 48.357,18.325 ; C15.2@47.082,10.318 C14.2 ; C15.2@47.19,10.027 47.19,9.515 46.825,9.15 44.2,9.15 ; U1.100@47.273,24.063 47.931,24.721 48.179,24.721 48.9,24 49.65,24 51.25,25.6 51.25,26.058 50.688,26.62 C10.2 ; 48.375,18.325 51.1,18.325 53.775,21 53.775,21.55 C8.2@54.45,22.225 ; C8.2@54,22.388 54.45,22.838 54.45,22.842 54.195,23.097 54.195,23.345 57.947,27.097 72.478,27.097 75.075,24.5 75.075,16.725 72.3,16.725 68.925,20.1 56.95,20.1 55.6,18.75 55.6,16.925 ; C9.2 55.6,16.925 ; 67.261,34.139 67.975,33.425 76.775,33.425 80.475,29.725 80.475,28.95 81.531,27.894 81.531,27.836 82.167,27.2
  Bottom Layer w0.5: 13.7,27.1 15.45,28.85 19.743,28.85 25.275,23.318
  Bottom Layer w1: 6.875,39.87 6.875,37.33 6.95,37.255 6.95,36.1 13.625,29.425 13.625,27.1 13.625,25.9 15.575,23.95 18.486,21.039 18.486,19.089 ; U2.2 18.725,18.425 U2.4@18.75,18.45 ; U2.4 U2.4@19.075,18.45 ; 19.964,18.5 20.55,17.914 20.55,15.425 16.8,11.675 12.9,11.675 12.013,10.788 9.788,10.788 9.415,10.415 9.415,6.85 9.415,4.31 9.415,1.961 10.001,1.375 35.875,1.375 ; 35.715,9.635 37.179,8.171 37.179,7.026 37.355,6.85 37.355,4.31 37.355,2.855 35.875,1.375 ; 44.975,8.375 44.975,6.85 44.975,4.31 44.975,2.85 43.5,1.375 ; 75.075,16.725 79.84,11.96 82.225,11.96 82.225,9.42 82.225,6.88 82.225,6.875 82.25,6.85 ; 82.25,6.9 84.765,6.9 ; 82.277,6.827 76.825,1.375 43.5,1.375 ; 82.3,27.2 84.765,27.2 86.7,27.2 88.232,25.668 88.525,25.375 88.525,8.55 86.814,6.839 84.936,6.839 84.765,7.01 84.765,9.42 84.765,11.96 84.765,14.5 ; 35.875,1.375 43.5,1.375
+5: C2.2 C13.2 D1.2 J1.1 J1.2 J2.1 J2.2 J5.1 U2.3 | length 52.4
  Bottom Layer w0.3: D1.2@6.925,16.425 8.2,16.425
  Bottom Layer w0.4: J5.1 4.667,21.2 6.8,21.2
  Bottom Layer w1: 4.335,4.31 4.335,6.85 4.335,11.985 8.788,16.438 9.387,16.438 10.875,17.925 10.875,19.105 U2.3 12.485,21.2 12.485,23.665 9.975,26.175 9.975,30.625 4.53,36.07 4.53,37.135 4.335,37.33 4.335,39.87 ; 6.8,21.2 12.3,21.2 U2.3@12.483,21.017
A0: J1.31 U1.23 | length 11.8
  Bottom Layer w0.3: U1.23 40.275,12.464 40.275,11.475 41.2,10.55 41.2,9.868 42.418,8.65 42.425,8.65 43.725,7.35 43.725,5.6 42.435,4.31
A1: J1.32 U1.24 | length 7.3
  Bottom Layer w0.3: U1.24@39.141,12.891 39.775,12.257 39.775,11.268 40.6,10.443 40.6,8.85 42.475,6.975
A2: J1.29 U1.25 | length 9.7
  Bottom Layer w0.3: U1.25@38.788,12.537 39.275,12.049 39.275,11.061 40,10.336 40,8.575 41.175,7.4 41.175,5.59 39.9,4.315
A3: J1.30 U1.26 | length 8.6
  Bottom Layer w0.3: U1.26@35.747,12.537 35.649,12.439 35.649,12.19 36.14,11.7 37.929,11.7 39.45,10.179 39.45,7.571 40.025,6.996 40.025,6.794
A4: J1.25 U1.29 | length 11.2
  Bottom Layer w0.3: U1.29@34.692,13.592 33.75,12.65 33.75,10.175 36.075,7.85 36.075,5.57 34.815,4.31
A5: J1.26 U1.30 | length 8.2
  Bottom Layer w0.3: U1.30@34.309,13.916 33.175,12.782 33.175,9.807 34.815,8.167 34.815,6.985 34.875,6.925
A6: J1.23 U1.31 | length 11.6
  Bottom Layer w0.3: 32.25,4.35 32.315,4.35 33.55,5.585 33.55,8.225 32.5,9.275 32.5,12.814 U1.31@34.005,14.32
A7: J1.24 U1.32 | length 8.7
  Bottom Layer w0.3: 32.275,6.85 32.275,8.1 31.85,8.525 31.85,12.872 U1.32@33.631,14.653
A8: J2.21 U1.67 | length 8.9
  Bottom Layer w0.3: 29.735,37.33 29.735,32.903 U1.67@32.919,29.719
A9: J2.22 U1.68 | length 11.3
  Bottom Layer w0.3: 29.75,39.775 29.974,39.775 31.05,38.699 31.05,32.295 U1.68@33.26,30.085
A10: J2.23 U1.69 | length 7.4
  Bottom Layer w0.3: 32.275,37.33 32.275,31.777 U1.69@33.589,30.464
A13: J2.26 U1.72 | length 9.9
  Bottom Layer w0.3: U1.72@34.624,31.549 34.05,32.124 34.05,34.775 34.325,35.05 34.325,35.057 35.618,36.35 35.625,36.35 36.1,36.825 36.1,38.525 34.8,39.825
A14: J2.29 U1.76 | length 5.2
  Bottom Layer w0.3: U1.76@38.788,32.548 39.895,33.655 39.895,37.33
A15: J2.30 U1.77 | length 9
  Bottom Layer w0.3: U1.77@39.141,32.194 41.175,34.228 41.175,38.295 39.925,39.545 39.925,39.8
B0: J1.19 U1.35 | length 13.6
  Bottom Layer w0.3: 27.225,4.325 27.225,4.34 28.475,5.59 28.475,11.618 U1.35@32.57,15.713
B1: J1.20 U1.36 | length 11.3
  Bottom Layer w0.3: 27.195,6.85 27.195,11.045 U1.36@32.217,16.067
B2: J1.17 U1.37 | length 15
  Bottom Layer w0.3: 24.725,4.38 25.95,5.605 25.95,10.507 U1.37@31.863,16.42
B3: J6.26 U1.89 | length 43.7
  Bottom Layer w0.3: U1.89@43.384,27.952 48.257,32.825 48.575,32.825 51.893,32.825 57.718,38.65 80.025,38.65 81.15,37.525 82.2,37.525
B4: J6.23 U1.90 | length 46.6
  Bottom Layer w0.3: U1.90@43.738,27.598 48.465,32.325 48.75,32.325 52.1,32.325 57.925,38.15 78.725,38.15 80.75,36.125 83.607,36.125 84.704,35.029
B5: J6.24 U1.91 | length 43.6
  Bottom Layer w0.3: U1.91@44.091,27.244 48.647,31.8 52.282,31.8 58.082,37.6 78.125,37.6 80.905,34.82 82.225,34.82
B6: J6.21 U1.92 | length 46.5
  Bottom Layer w0.3: U1.92@44.445,26.891 48.779,31.225 52.414,31.225 58.289,37.1 77.45,37.1 81.025,33.525 83.594,33.525 84.769,32.35
B7: J6.22 U1.93 | length 43.4
  Bottom Layer w0.3: U1.93@44.798,26.537 48.986,30.725 52.622,30.725 58.497,36.6 76.8,36.6 81.013,32.387 82.118,32.387 82.225,32.28
B8: J6.15 U1.95 | length 46.3
  Bottom Layer w0.3: U1.95@45.505,25.83 49.4,29.725 53.036,29.725 56.011,32.7 75.875,32.7 80.375,28.2 80.375,26.65 81.05,25.975 83.45,25.975 84.765,24.66
B9: J6.16 U1.96 | length 43.2
  Bottom Layer w0.3: U1.96@45.859,25.477 49.607,29.225 53.325,29.225 56.177,32.077 75.473,32.077 79.8,27.75 79.8,25.95 80.776,24.974 81.616,24.974 81.93,24.66 82.225,24.66
B10: J1.7 U1.47 | length 24.4
  Bottom Layer w0.3: 11.955,4.31 13.225,5.58 13.225,8.175 14.8,9.75 17.193,9.75 23.318,15.875 24.236,15.875 27.886,19.525 U1.47@28.323,19.961
B11: J1.8 U1.48 | length 22.7
  Bottom Layer w0.3: 11.925,6.9 11.955,6.93 11.955,8.73 13.5,10.275 16.875,10.275 22.975,16.375 24.029,16.375 U1.48@27.969,20.315
B12: J2.5 U1.51 | length 24.1
  Bottom Layer w0.3: 9.415,37.33 9.415,36.06 15.6,29.875 21.425,29.875 U1.51@27.25,24.05
B13: J2.6 U1.52 | length 26.2
  Bottom Layer w0.3: 9.415,39.87 10.725,38.56 10.725,35.85 16.1,30.475 21.539,30.475 U1.52@27.607,24.408
B14: J2.7 U1.53 | length 22
  Bottom Layer w0.3: 11.955,37.33 11.989,37.296 11.989,35.961 16.925,31.025 21.697,31.025 U1.53@27.96,24.761
B15: J2.8 U1.54 | length 23.8
  Bottom Layer w0.3: 11.975,39.775 13.25,38.5 13.25,36.125 17.8,31.575 21.854,31.575 U1.54@28.314,25.115
C0: D3.2 J1.37 U1.15 | length 36.9
  Bottom Layer w0.3: U1.15@42.323,16.072 43.4,14.995 43.4,14.476 43.576,14.3 51.5,14.3 53.15,12.65 ; 50.075,4.35 51.35,5.625 51.35,7.975 53.15,9.775 53.15,12.65 ; D3.2 54.125,11.675 53.15,12.65
C1: J1.38 U1.16 | length 18.4
  Bottom Layer w0.3: U1.16@41.97,15.719 42.9,14.788 42.9,14.107 43.207,13.8 51,13.8 52.175,12.625 52.175,9.825 50.264,7.914 50.264,7.221 50.068,7.025
C2: J1.35 U1.17 | length 21
  Bottom Layer w0.3: U1.17@41.616,15.365 42.4,14.581 42.4,13.9 43,13.3 50.475,13.3 51.35,12.425 51.35,9.95 48.775,7.375 48.775,5.57 47.55,4.345 47.55,4.3
C3: J1.36 U1.18 | length 18
  Bottom Layer w0.3: U1.18@41.263,15.012 41.9,14.374 41.9,13.667 42.767,12.8 49.925,12.8 50.5,12.225 50.5,9.825 49.275,8.6 48.35,8.6 47.567,7.817 47.567,6.902 47.515,6.85
C4: J1.21 U1.33 | length 12
  Bottom Layer w0.3: 29.85,4.5 29.925,4.5 31.025,5.6 31.025,12.754 U1.33@33.278,15.006
C5: J1.22 U1.34 | length 9.8
  Bottom Layer w0.3: 29.735,6.85 29.735,12.171 U1.34@32.924,15.36
C6: J2.17 U1.63 | length 11.9
  Bottom Layer w0.3: 24.655,37.33 24.655,35.155 U1.63@31.505,28.305
C7: J2.18 U1.64 | length 14.1
  Bottom Layer w0.3: 24.7,39.8 25.925,38.575 25.925,34.592 U1.64@31.858,28.659
C8: J2.19 U1.65 | length 10.4
  Bottom Layer w0.3: 27.125,37.35 27.125,34.099 U1.65@32.212,29.012
C9: J2.20 U1.66 | length 12.7
  Bottom Layer w0.3: 27.275,39.9 28.45,38.725 28.45,33.481 U1.66@32.565,29.366
C10: J2.31 U1.78 | length 6.7
  Bottom Layer w0.3: U1.78@39.495,31.841 41.675,34.021 42.435,34.781 42.435,37.33
C11: J2.32 U1.79 | length 10.5
  Bottom Layer w0.3: U1.79@39.848,31.487 41.882,33.521 43.7,35.339 43.7,38.605 42.435,39.87
C12: J2.33 U1.80 | length 8.2
  Bottom Layer w0.3: U1.80@40.202,31.134 42.089,33.021 44.925,35.857 44.925,37.375
C13: D4.2 U1.7 | length 28.4
  Bottom Layer w0.3: U1.7@45.152,18.901 45.925,18.127 46.227,17.825 51.8,17.825 59.65,25.675 68.6,25.675 69.05,25.225 69.05,25.2 D4.2@69.449,24.801
C14: C19.2 U1.8 Y2.2 | length 20.2
  Bottom Layer w0.3: U1.8@44.798,18.547 45.425,17.92 46.02,17.325 52.25,17.325 56.497,21.572 60.997,21.572 ; 60.96,21.65 60.96,23.335 C19.2@61,23.375
C15: C20.2 U1.9 Y2.1 | length 25.6
  Bottom Layer w0.3: U1.9@44.445,18.194 44.925,17.713 45.813,16.825 52.625,16.825 56.4,20.6 64.79,20.6 65.84,21.65 65.84,23.31 C20.2@65.825,23.325
D0: J2.34 U1.81 | length 12
  Bottom Layer w0.3: U1.81@40.555,30.78 42.296,32.521 46.25,36.475 46.25,38.821 45.085,39.985
D1: J2.35 U1.82 | length 9.6
  Bottom Layer w0.3: U1.82@40.909,30.427 42.503,32.021 47.154,36.672 47.154,36.674 47.515,37.035 47.515,37.33
D2: J2.36 U1.83 | length 14.1
  Bottom Layer w0.3: U1.83@41.263,30.073 42.71,31.521 47.015,35.825 48.3,35.825 48.8,36.325 48.8,38.575 47.575,39.8
D3: J2.37 U1.84 | length 12.1
  Bottom Layer w0.3: U1.84@41.616,29.719 42.918,31.021 47.222,35.325 49,35.325 49.975,36.3 49.975,37.3
D4: J2.38 U1.85 | length 16.2
  Bottom Layer w0.3: U1.85@41.97,29.366 43.125,30.521 47.429,34.825 49.725,34.825 51.325,36.425 51.325,38.6 50.325,39.6 50.325,39.9
D5: J2.39 U1.86 | length 14.3
  Bottom Layer w0.3: U1.86@42.323,29.012 47.636,34.325 48.075,34.325 50.6,34.325 52.465,36.19 52.465,37.2 52.595,37.33
D6: J2.40 U1.87 | length 19.8
  Bottom Layer w0.3: U1.87@42.677,28.659 47.843,33.825 48.3,33.825 ; 48.3,33.825 51.479,33.825 54.6,36.946 54.6,39.021 53.868,39.753 52.712,39.753 52.595,39.87
D7: J6.25 U1.88 | length 47
  Bottom Layer w0.3: U1.88@43.03,28.305 48.05,33.325 48.507,33.325 51.686,33.325 57.562,39.201 82.924,39.201 84.765,37.36
D8: J2.9 U1.55 | length 19.8
  Bottom Layer w0.3: 14.495,37.33 14.495,36.08 18.45,32.125 22.011,32.125 U1.55@28.668,25.468
D9: J2.10 U1.56 | length 22
  Bottom Layer w0.3: 14.495,39.87 15.936,38.429 15.936,35.564 18.875,32.625 22.218,32.625 U1.56@29.021,25.822
D10: J2.11 U1.57 | length 18
  Bottom Layer w0.3: 17.035,37.33 17.035,35.49 19.4,33.125 22.425,33.125 U1.57@29.375,26.175
D11: J2.12 U1.58 | length 19.9
  Bottom Layer w0.3: 17.1,39.925 17.1,39.805 18.325,38.58 18.325,35.725 20.425,33.625 22.636,33.625 U1.58@29.73,26.531
D12: J2.13 U1.59 | length 15.9
  Bottom Layer w0.3: 19.575,37.33 19.575,35.507 20.882,34.2 22.768,34.2 U1.59@30.084,26.884
D13: J2.14 U1.60 | length 18.4
  Bottom Layer w0.3: 19.625,39.82 20.85,38.595 20.85,35.65 21.8,34.7 22.988,34.7 U1.60
D14: J2.15 U1.61 | length 13.6
  Bottom Layer w0.3: 22.115,37.33 22.115,35.81 22.7,35.225 23.171,35.225 U1.61@30.797,27.598
D15: J2.16 U1.62 | length 15.7
  Bottom Layer w0.3: 22.275,39.95 22.275,39.71 23.425,38.56 23.425,35.678 U1.62@31.151,27.952
E0: J6.13 U1.97 | length 46.1
  Bottom Layer w0.3: U1.97@46.212,25.123 49.814,28.725 53.668,28.725 56.398,31.455 75.17,31.455 79.225,27.4 79.225,25.25 81.1,23.375 83.786,23.375 84.65,22.511 84.65,22.425
E1: J6.14 U1.98 | length 43
  Bottom Layer w0.3: U1.98@46.566,24.77 50.021,28.225 53.875,28.225 56.482,30.832 74.818,30.832 78.65,27 78.65,24.85 81.293,22.207 82.138,22.207 82.225,22.12
E2: J6.11 U1.1 | length 47.3
  Bottom Layer w0.3: U1.1@47.273,21.022 47.47,20.825 48.07,20.825 57.455,30.21 74.415,30.21 78.1,26.525 78.1,23.7 80.975,20.825 83.525,20.825 84.632,19.718
E3: J6.12 U1.2 | length 45.3
  Bottom Layer w0.3: U1.2@46.919,20.668 47.263,20.325 48.277,20.325 57.539,29.587 74.063,29.587 77.525,26.125 77.525,22.975 80.863,19.637 82.168,19.637 82.225,19.58
E4: J6.9 U1.3 | length 49.2
  Bottom Layer w0.3: U1.3@46.566,20.315 47.056,19.825 48.484,19.825 57.624,28.965 73.735,28.965 76.925,25.775 76.925,22.225 80.775,18.375 83.43,18.375 84.765,17.04
E5: J6.10 U1.4 | length 46.9
  Bottom Layer w0.3: U1.4@46.212,19.961 46.849,19.325 48.691,19.325 57.708,28.342 73.358,28.342 76.375,25.325 76.375,21.55 80.676,17.249 82.026,17.249 82.223,17.052
E6: J6.8 U1.5 | length 48.2
  Bottom Layer w0.3: U1.5@45.859,19.608 46.642,18.825 48.898,18.825 51.273,21.2 57.823,27.75 72.925,27.75 75.75,24.925 75.75,20.975 82.225,14.5
E7: J1.18 U1.38 | length 12.7
  Bottom Layer w0.3: 24.675,6.9 24.675,9.939 25.45,10.714 U1.38@31.51,16.774
E8: J1.15 U1.39 | length 16.5
  Bottom Layer w0.3: 22.115,4.31 23.375,5.57 23.375,9.346 U1.39@31.105,17.076
E9: J1.16 U1.40 | length 14.1
  Bottom Layer w0.3: 22.115,6.85 22.115,8.804 U1.40@30.709,17.398
E10: J1.13 U1.41 | length 18.7
  Bottom Layer w0.3: 19.575,4.31 19.575,4.525 20.85,5.8 20.85,8.246 U1.41
E11: J1.14 U1.42 | length 15.9
  Bottom Layer w0.3: 19.575,6.85 19.735,7.01 19.735,8.16 24.95,13.375 25.272,13.375 U1.42@30.09,18.194
E12: J1.11 U1.43 | length 19.8
  Bottom Layer w0.3: 17.035,4.31 18.3,5.575 18.3,7.55 24.625,13.875 25.065,13.875 U1.43@29.737,18.547
E13: J1.12 U1.44 | length 17.5
  Bottom Layer w0.3: 17.035,6.85 17.035,7.11 24.3,14.375 24.858,14.375 U1.44@29.383,18.901
E14: J1.9 U1.45 | length 22.1
  Bottom Layer w0.3: 14.625,4.3 14.625,4.44 15.8,5.615 15.8,8.025 16.525,8.75 17.775,8.75 23.9,14.875 24.65,14.875 28.3,18.525 U1.45@29.03,19.254
E15: J1.10 U1.46 | length 20.2
  Bottom Layer w0.3: 14.495,6.85 14.495,8.145 15.6,9.25 17.4,9.25 23.525,15.375 24.443,15.375 28.093,19.025 U1.46@28.676,19.608
GND: C1.1 C2.1 C3.1 C4.1 C5.1 C6.1 C7.1 C8.1 C9.1 C10.1 C11.1 C12.1 C13.1 C14.1 C15.1 C16.1 C17.1 C18.1 C19.1 C20.1 J1.3 J1.4 J1.39 J1.40 J2.27 J2.28 J5.5 J5.6 J5.7 J5.8 J5.9 J5.10 J5.11 J6.19 J6.20 pad.2 pad.3 pad.4 pad.6 pad.7 R3.2 R4.2 R5.1 R6.2 R7.2 SW1.B SW1.B' U1.10 U1.19 U1.20 U1.27 U1.49 U1.74 U1.99 U2.1 | length 432.5
  Top Layer w0.3: 72.075,11.05 72.075,42.25 ; 73.7,20.15 73.7,41.95 73.75,42
  Bottom Layer w0.254: U1.49 29.114,22.167 ; U1.27 37.299,14.796 ; 37.299,17.561 U1.20@39.68,15.18 ; 40.667,21.264 U1.10 U1.10@43.652,18.282 ; C17.1@43.044,12.084 C17.1 ; 45.703,23.2 U1.99
  Bottom Layer w0.3: C5.1@19.441,25.616 21.129,23.929 ; C6.1@21.175,23.975 24.348,20.802 24.348,20.554 R4.2 23.603,19.665 23.994,19.275 26.222,19.275 U1.49@27.615,20.668 ; 29.114,22.167 32.342,22.167 ; U1.74@35.406,32.181 34.825,32.763 34.825,34.85 35.825,35.85 35.832,35.85 36.382,36.4 37.396,36.4 36.997,36.001 ; U1.27 34.975,12.472 34.975,11.825 35.74,11.06 37.149,11.06 38.159,10.05 C7.1@38.25,10.05 ; 36.997,35.88 37.165,35.88 37.355,36.07 ; 37.299,14.796 37.299,17.323 ; 37.344,27.788 37.344,32.905 ; 37.7,18.475 37.7,17.867 U1.19@40.109,15.459 ; U1.20@40.555,14.304 42.05,12.81 42.05,12.075 42.423,11.702 C17.1 C16.1@45.223,11.702 ; 42.479,22.767 42.911,23.2 45.703,23.2 ; C16.1@45.233,11.725 47.012,11.725 C15.1 ; U1.99@46.919,24.416 48.133,25.63 48.738,25.63 48.826,25.718 49.392,25.718 C10.1 ; C15.1@47.04,11.718 C14.1 ; 52.595,6.85 52.634,6.889 ; C8.1@55.768,23.568 58.675,26.475 71.6,26.475 73.627,24.448 R7.2@73.627,22.952 ; C9.1 57.7,18.325 58.1,18.725 58.1,18.85 58.65,19.4 61.915,19.4 62.09,19.224 62.09,18.615 62.383,18.323 62.402,18.323 62.475,18.25 C18.1 64.374,18.349 64.374,19.199 64.575,19.4 67.425,19.4 67.8,19.025 67.8,17.525 72.15,13.175 72.15,11.025 ; C4.1 C4.1@62.075,18.6 ; C20.1@64.424,23.9 64.449,23.925 64.449,24.499 64.875,24.925 67.15,24.925 68.25,23.825 68.25,22.55 70.613,20.187 73.663,20.187 ; R6.2 70.1,10.55 70.625,10.025 ; R7.2 73.663,22.763 73.663,20.187 ; 73.7,20.15 73.663,20.187 ; R5.1 75.8,35.25 76.152,35.264 76.376,35.041 76.924,35.041 81.637,30.328 81.637,30.27 82.167,29.74 82.225,29.74
  Bottom Layer w0.4: J5.10@1.5,23.8 J5.5
  Bottom Layer w0.5: 1.375,18.125 1.5,18.25 ; 1.475,26.9 3.375,26.9 3.8,26.475 3.8,25.275 4.075,25 ; 2.075,18.9 2.075,18.5 1.968,18.393 1.643,18.393 1.5,18.25 ; 4.075,20 3.801,19.726 3.801,18.976 3.075,18.25 ; J5.5 4.075,24.775 ; C2.1@8.913,18.881 C13.1 6.981,18.881 6.681,18.581 6.681,18.543 6.388,18.25 3.075,18.25 ; 52.634,6.889 53.031,7.286 53.636,7.286 55.293,8.943 55.293,9.693 SW1.B' ; SW1.B'@55.55,9.9 SW1.B ; SW1.B@62.3,10.025 70.575,10.025 ; C19.1@62.375,23.6 62.425,23.55 C20.1 ; 70.625,10.025 71.15,10.025 72.15,11.025 ; 1.5,18.25 3.075,18.25
  Bottom Layer w1: 1.337,18.075 1.375,18.113 1.375,18.125 1.375,18.2 ; 1.375,18.075 1.375,2.325 2.4,1.3 6.289,1.3 6.875,1.886 6.875,4.31 6.875,6.85 6.875,12.15 9.235,14.51 10.51,14.51 12.135,16.135 U2.1 12.89,16.135 13.856,15.169 13.856,13.819 C1.1@13.867,13.809 ; J5.8 J5.9 J5.10 J5.11 J5.11@1.375,26.1 ; 1.375,26.95 1.125,26.95 0.925,27.15 0.925,42.539 2.511,44.125 35.05,44.125 ; C1.1 13.842,13.809 C1.1@13.867,13.809 ; C12.1 15.707,13.809 C1.1@13.867,13.809 ; 37.344,32.905 38.619,34.18 38.619,35.009 37.355,36.273 ; 37.355,36.07 37.355,37.33 37.355,39.87 37.355,41.82 35.05,44.125 ; 52.595,4.31 52.595,6.845 ; 72,42.25 71.975,42.275 71.975,43.9 71.75,44.125 ; 73.7,42.25 73.75,42.3 73.75,44 ; 82.285,29.74 84.765,29.74 87.465,29.74 88.6,30.875 88.6,41.8 86.275,44.125 71.75,44.125 ; 35.05,44.125 71.75,44.125
NetC4_2: C4.2 U1.12 Y1.2 | length 20.6
  Bottom Layer w0.3: U1.12@43.384,17.133 44.717,15.8 59.529,15.8 60.054,16.325 60.91,16.325 60.91,17.815 C4.2@60.45,18.275 ; C4.2@60.675,18.15 C4.2
NetC18_2: C18.2 U1.13 Y1.1 | length 25.7
  Bottom Layer w0.3: U1.13@43.03,16.779 44.51,15.3 64.59,15.3 64.766,15.476 64.766,15.886 65.205,16.325 65.79,16.325 65.79,17.74 C18.2@65.975,17.925
NetD1_1: D1.1 R3.1 | length 2.4
  Bottom Layer w0.3: R3.1@3.275,15.475 3.275,15.794 3.406,15.925 4.025,15.925 4.441,16.341 D1.1
NetD2_1: D2.1 R4.1 | length 6.3
  Bottom Layer w0.3: D2.1 19.643,22.882 20.143,22.882 R4.1@22.325,20.7
NetD3_1: D3.1 R6.1 | length 2.3
  Bottom Layer w0.3: D3.1 69.774,13.326 R6.1@69.8,13.3
NetD4_1: D4.1 R7.1 | length 2.8
  Bottom Layer w0.3: D4.1 71.2,24.7 71.65,24.7 71.973,24.377 R7.1
NetJ5_2: J5.2 R1.2 | length 10.8
  Bottom Layer w0.3: J5.2 5.2,21.85 6.825,23.475 6.825,30.143 6.462,30.506 R1.2
NetJ5_3: J5.3 R2.2 | length 8.8
  Bottom Layer w0.3: J5.3@4.181,22.45 4.262,22.531 4.956,22.531 6.325,23.9 6.325,27.75 5.024,29.051 R2.2@5.024,29.429
NetJ5_4: J5.4
NetP1_2: P1.2 U1.94 | length 23.3
  Bottom Layer w0.3: U1.94@45.152,26.184 49.193,30.225 52.829,30.225 55.879,33.275 63.95,33.275 64.301,33.626 64.301,34.576 64.4,34.675
NetP1_3: P1.3 R5.2 | length 11.6
  Bottom Layer w0.3: 61.86,34.675 61.86,35.391 62.498,36.029 70.921,36.029 71.4,35.55 71.846,35.55 72.075,35.321 R5.2
NRST: SW1.A SW1.A' U1.14 | length 20.5
  Bottom Layer w0.3: U1.14@42.677,16.426 43.9,15.203 43.9,14.976 44.076,14.8 52.6,14.8 53.5,13.9 SW1.A' ; SW1.A'@55.825,13.825 55.9,13.9 SW1.A
USB_D_N: J2.24 R1.1 U1.70 | length 53.4
  Bottom Layer w0.254: 32.944,31.804 34.267,30.481 34.416,30.332 U1.70@34.41,30.338
  Bottom Layer w0.3: R1.1 5.284,31.865 4.96,31.865 2.85,33.975 2.85,42.074 3.026,42.25 30.875,42.25 32.275,40.85 32.275,39.575 32.575,39.275 32.575,39.017 33.575,38.017 33.575,36.325 32.944,35.694 32.944,31.804
USB_D_P: J2.25 R2.1 U1.71 | length 57.1
  Bottom Layer w0.254: 33.491,32.008 33.491,31.975 U1.71
  Bottom Layer w0.3: R2.1 4.071,30.629 4.071,30.954 2.25,32.775 2.25,42.323 2.777,42.85 32.175,42.85 33.575,41.45 33.575,38.8 34.663,37.712 34.663,37.179 ; 33.491,32.008 33.475,32.024 33.475,35.474 34.606,36.605 34.606,37.121 34.815,37.33
VREF+: C16.2 C17.2 U1.21 | length 7.1
  Bottom Layer w0.3: U1.21@40.202,13.951 41.35,12.803 41.35,11.814 42.462,10.702 43.026,10.702 C17.2 ; C17.2@43.442,10.292 C16.2
pads on no net: U1.73

## Polygon pours and split planes (outlines as drawn)
GND on Bottom Layer "GND_L02_P004" (solid, pour order 4): 4.9,20.775 4.625,20.5 0.425,20.5 0.425,17.05 0.4,17.025 3.45,17.025 4.9,18.475
GND on Bottom Layer "GND_L02_P003" (solid, pour order 3): 0.475,24.775 0.475,26.85 0.475,32.125 0.6,32.125 4.925,27.8 4.925,24.775
GND on Bottom Layer "GND_L02_P002" (solid, pour order 2): 37.3,17.1 42.95,22.75 37.275,28.425 37.275,28.4 31.65,22.775 37.3,17.125
no net on Bottom Layer "NONET_L02_P000" (solid, pour order 0): 78.675,4.739 76.169,2.304 54.669,2.304 54.644,2.329 54.644,6.404 56.694,8.454 78.675,8.454

## Keep-outs
Keep-Out Layer:
  lines w0.254: -2.521,9.954 ccw(c-2,7) -5,7 -5,3 ccw(c-2,3) -2,0 87,0 ccw(c87,3) 90,3 90,42 ccw(c87,42) 87,45 -2,45 ccw(c-2,42) -5,42 -5,38 ccw(c-2,38) -2.521,35.046 ; -2.479,10.046 ccw(c-3,13) 0,13 0,32 ccw(c-3,32) -2.479,34.954

## Other copper
Bottom Layer:
  rectangle net GND: 0.425,26.25 2.325,27.65
  rectangle net GND: 0.425,17.5 2.325,18.75
  text "SNJK" at 40.25,21.854 h2.5
  text "SNJK" at 66.087,6.323 h1.8
  text "V 1.3" at 75.35,6.321 h1.8
  text "STM32F103VGT6" at 75.15,3.429 h2.5

## Silkscreen, mask and mechanical layers (free items; w line width, h text height)
Top Overlay:
  text "+5" at 4.783,41.75 h1.52 r90
  text "3V3" at 7.327,41.75 h1.52 r90
  text "B13" at 9.871,41.75 h1.52 r90
  text "B15" at 12.415,41.75 h1.52 r90
  text "D9" at 14.959,41.75 h1.52 r90
  text "D11" at 17.487,41.75 h1.52 r90
  text "D13" at 20.031,41.75 h1.52 r90
  text "D15" at 22.575,41.75 h1.52 r90
  text "C7" at 25.131,41.75 h1.52 r90
  text "C9" at 27.688,41.75 h1.52 r90